# EAGLE board 388 Design Project Schematic (EAGLE 9.2.2)

Size 160 x 100 mm. Coordinates in mm from the lower left corner, seen from the top.
Outline: 0,0 160,0 160,100 0,100 0,0
Copper layers (1*16): Top 0.035mm / dielectric 1.5mm / Bottom 0.035mm
Design rules "default": minimum track width 6mil, minimum drill 0.35mm, track to track 6mil, track to pad 6mil, pad to pad 6mil, via to via 6mil, smd to smd 6mil, copper to edge 40mil, drill to drill 6mil, minimum pad ring 10mil, minimum via ring 8mil, stop-mask expansion 4mil, vias tented up to drill 0mil, thermal gap 10mil

## Footprints (pad centres in the part's own frame; a part is rotated, then mirrored left to right if it is on the bottom)
SPC4078 = drill 0.8 pad 2.184 long: 1 -3,0; 2 0,-4.8 | drill 1 pad 2.184 long: 3 3,0
C025-024X044 = drill 0.813 octagon: 1 -1.27,0; 2 1.27,0
DO214BA = smd 1.8 x 1.7: A 2.05,0; C -2.05,0
SOT223 = smd 1.219 x 2.235: 1 -2.311,-3.099; 2 0,-3.099; 3 2.311,-3.099 | smd 3.6 x 2.2: 4 0,3.099
CHIPLED_0805 = smd 1.2 x 1.2: A 0,-1.05; C 0,1.05
R0805 = smd 1.3 x 1.5: 1 -0.95,0; 2 0.95,0
TO18 = drill 0.813 octagon: 1 -1.27,-1.27; 2 1.27,-1.27; 3 1.27,1.27
DIP28 = drill 0.813 pad 1.626: 1 -16.51,-3.81; 2 -13.97,-3.81; 3 -11.43,-3.81; 4 -8.89,-3.81; 5 -6.35,-3.81; 6 -3.81,-3.81; 7 -1.27,-3.81; 8 1.27,-3.81; 9 3.81,-3.81; 10 6.35,-3.81; 11 8.89,-3.81; 12 11.43,-3.81; 13 13.97,-3.81; 14 16.51,-3.81; 15 16.51,3.81; 16 13.97,3.81; 17 11.43,3.81; 18 8.89,3.81; 19 6.35,3.81; 20 3.81,3.81; 21 1.27,3.81; 22 -1.27,3.81; 23 -3.81,3.81; 24 -6.35,3.81; 25 -8.89,3.81; 26 -11.43,3.81; 27 -13.97,3.81; 28 -16.51,3.81
AK300/2 = drill 1.321 long: 1 -2.515,0; 2 2.489,0
SMKDSP_1,5/4 = drill 1.6 pad 1.8 long: 1 -2.5,0; 2 2.5,0; 3 7.5,0; 4 12.5,0
W237-103 = drill 1.194 long: 1 -5,-1.29; 2 0,-1.29; 3 5,-1.29
AK300/3 = drill 1.321 long: 1 -5.004,0; 2 0,0; 3 5.004,0
332-02 = drill 0.9 pad 1.27: 1 0,-1; 2 0,1

## Placement (x,y rotation side)
BARREL_JACK  [SPC4078]  -52.07,22.86 0 top  (outside the outline)
C2  220  [C025-024X044]  -64.77,48.26 0 top  (outside the outline)
C4  220  [C025-024X044]  -15.24,57.15 0 top  (outside the outline)
C5  220  [C025-024X044]  -20.32,57.15 0 top  (outside the outline)
C6  220  [C025-024X044]  -25.4,57.15 0 top  (outside the outline)
C7  220  [C025-024X044]  -30.48,57.15 0 top  (outside the outline)
C8  47  [C025-024X044]  -54.61,48.26 0 top  (outside the outline)
C9  47  [C025-024X044]  -35.56,57.15 0 top  (outside the outline)
C10  220  [C025-024X044]  -40.64,57.15 0 top  (outside the outline)
C11  220  [C025-024X044]  -45.72,57.15 0 top  (outside the outline)
D1  [DO214BA]  -62.23,62.23 0 top  (outside the outline)
IC1  MC33269ST-3.3T3  [SOT223]  -26.67,49.53 0 top  (outside the outline)
LED2  Green  [CHIPLED_0805]  -26.67,62.23 0 top  (outside the outline)
R1  220  [R0805]  -52.07,57.15 0 top  (outside the outline)
R2  220  [R0805]  -57.15,57.15 0 top  (outside the outline)
R3  10k  [R0805]  -16.51,63.5 0 top  (outside the outline)
R4  220  [R0805]  -67.31,-3.81 0 top  (outside the outline)
R6  220  [R0805]  -62.23,57.15 0 top  (outside the outline)
R7  220  [R0805]  -67.31,57.15 0 top  (outside the outline)
R8  10k  [R0805]  -21.59,63.5 0 top  (outside the outline)
T1  2N2222  [TO18]  -40.64,63.5 0 top  (outside the outline)
T2  2N2222  [TO18]  -54.61,63.5 0 top  (outside the outline)
U1  328P  [DIP28]  -48.26,38.1 0 top  (outside the outline)
WHITE_LED  [AK300/2]  -62.23,6.35 0 top  (outside the outline)
X1  [AK300/2]  -19.05,22.86 0 top  (outside the outline)
X2  [AK300/2]  -30.48,22.86 0 top  (outside the outline)
X3  [AK300/2]  -41.91,22.86 0 top  (outside the outline)
X4  Screw Hole 1  [SMKDSP_1,5/4]  -29.21,7.62 0 top  (outside the outline)
X6  [W237-103]  -20.32,40.64 0 top  (outside the outline)
X7  [AK300/3]  -43.18,6.35 0 top  (outside the outline)
X9  332-02  [332-02]  -36.83,49.53 0 top  (outside the outline)
X10  332-02  [332-02]  -44.45,49.53 0 top  (outside the outline)

## Library data of the parts
BARREL_JACK = con-jack; OC_FARNELL: unknown; OC_NEWARK: unknown
C2 C4-C11 = rcl; SPICEPREFIX: C
D1 = diode
IC1 = linear
LED2 = led
R1-R4 R6-R8 = rcl; SPICEPREFIX: R
T1 T2 = transistor-neu-to92
U1 = SparkFun-IC-Microcontroller; PROD_ID: IC-09136
WHITE_LED X1-X3 X7 = con-ptr500; OC_FARNELL: unknown; OC_NEWARK: unknown
X4 = con-phoenix-smkdsp; MF: FARNELL; MPN: 1733596; OC_FARNELL: 3041268; OC_NEWARK: 71C4131
X6 = con-wago-500; MPN: 237-103; OC_FARNELL: unknown; OC_NEWARK: 18M7116
X9 X10 = con-garry

## Nets
N$1: BARREL_JACK.3 D1.A
N$2: R2.1 X4.1
N$3: T2.1 WHITE_LED.1
N$4: R3.2 T2.2 X2.2
N$5: R4.2 U1.23
N$6: BARREL_JACK.1 BARREL_JACK.2 C2.1 C4.1 C5.1 C6.1 C7.1 C9.2 C10.1 C11.1 IC1.1 U1.22 WHITE_LED.2 X1.2 X2.1 X3.2 X4.2 X6.1 X7.1
N$7: C8.2 C9.1 IC1.2 IC1.4 R3.1 R8.2 T1.1 T2.3 U1.7 X6.3 X7.2
N$8: C11.2 U1.18 X7.3
N$9: C7.2 R2.2 U1.5
N$10: C10.2 U1.14 X3.1
N$11: R4.1 T1.2
N$12: C5.2 R7.2 U1.12
N$13: C4.2 R6.2 U1.11
N$14: R6.1 X4.3
N$15: R7.1 X4.4
N$16: LED2.C X9.1
N$17: T1.3 X9.2
N$19: LED2.A R1.1
N$21: R1.2 X10.1
N$22: C8.1 D1.C IC1.3 X10.2
N$25: C6.2 R8.1 U1.4 X6.2
N$26: C2.2 U1.13 X1.1

## Tracks (layer width: path | path; a pad name or v marks a point on that pad's centre or on a via)
N$1  (1 unrouted)
N$2  (1 unrouted)
N$3  (1 unrouted)
N$4  (2 unrouted)
N$5  (1 unrouted)
N$6  (18 unrouted)
N$7  (10 unrouted)
N$8  (2 unrouted)
N$9  (2 unrouted)
N$10  (2 unrouted)
N$11  (1 unrouted)
N$12  (2 unrouted)
N$13  (2 unrouted)
N$14  (1 unrouted)
N$15  (1 unrouted)
N$16  (1 unrouted)
N$17  (1 unrouted)
N$19  (1 unrouted)
N$21  (1 unrouted)
N$22  (3 unrouted)
N$25  (3 unrouted)
N$26  (2 unrouted)